# Altium PCB 404DoublesidePCB.PcbDoc
Units mil, origin at the board's own origin, x right, y up, seen from the top; angles counter-clockwise.
Board outline 6000 x 4000 mil, 2 copper layers (Top Layer, Bottom Layer); 27 components, 15 nets, 69 pads, 12 vias.
Unrouted connection lines stored in the file: 52.
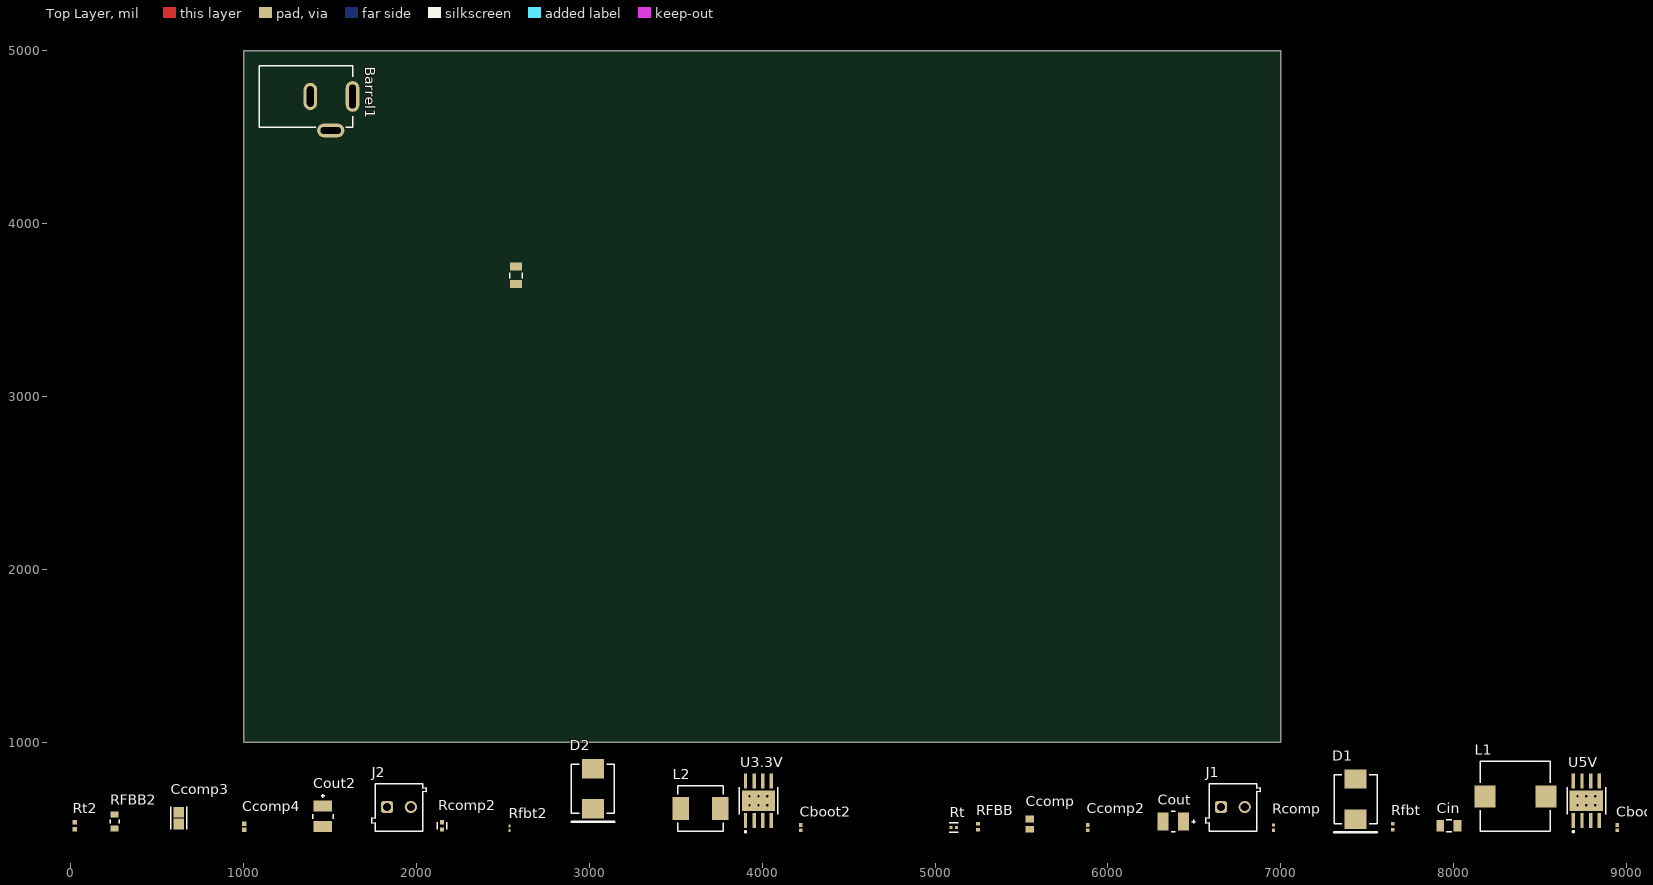
[diagram p0: Top Layer view]
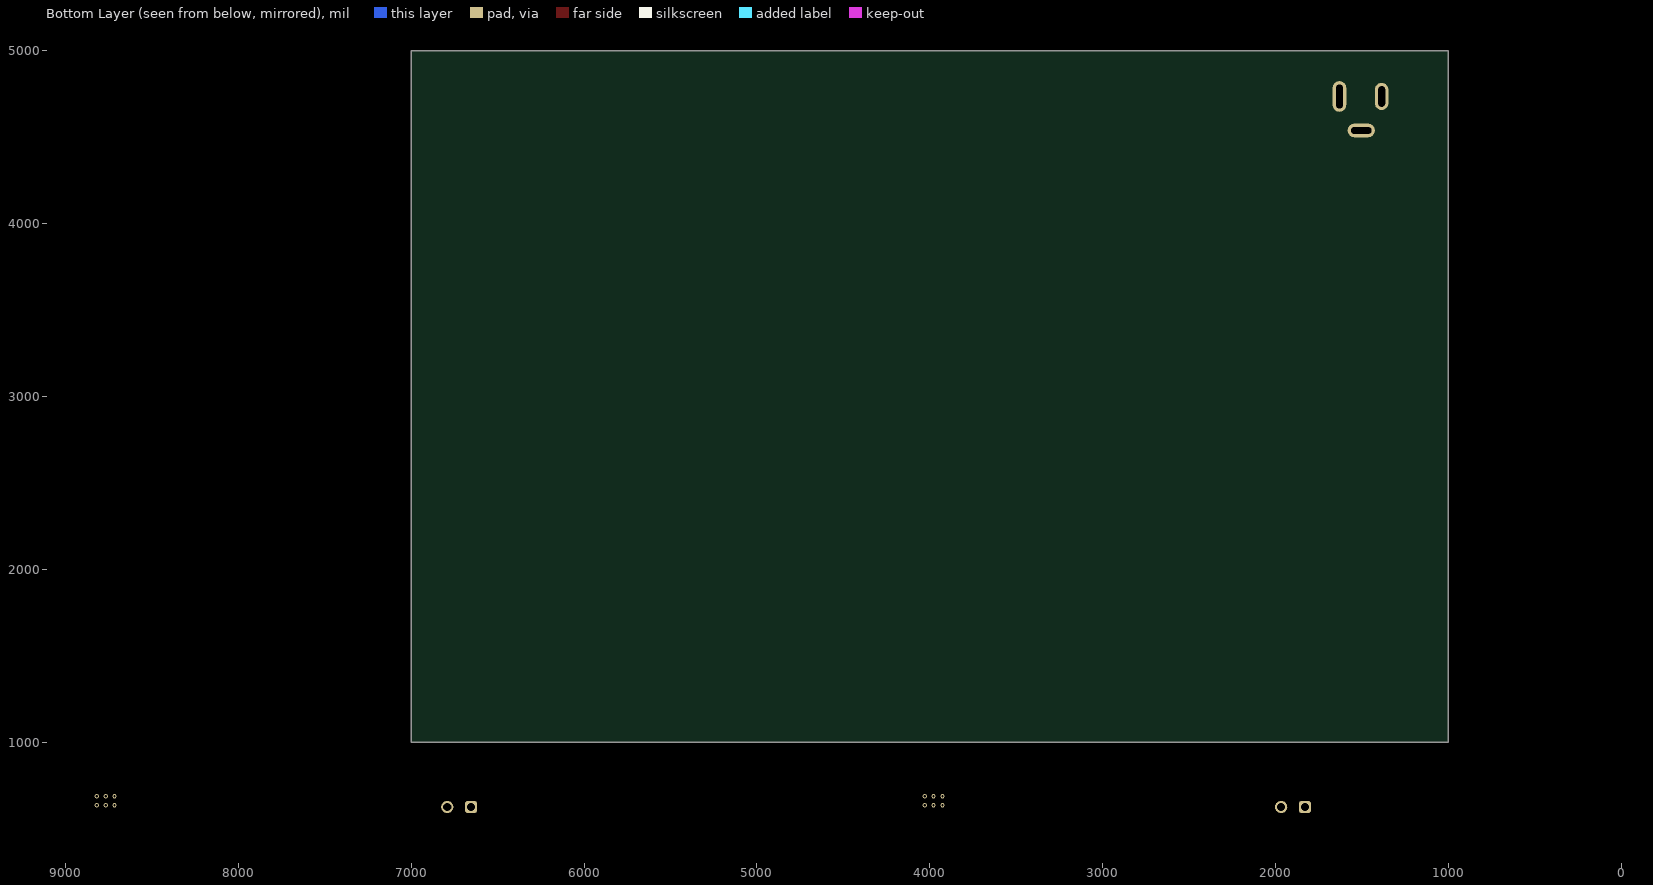
[diagram p1: Bottom Layer view, seen from below]

## Layer stack, top to bottom
Top Solder: solder mask 0.4, Solder Resist, Dk 3.5
Top Layer: signal copper 1.4
Dielectric 1: dielectric 12.6, FR-4, Dk 4.8
Bottom Layer: signal copper 1.4
Bottom Solder: solder mask 0.4, Solder Resist, Dk 3.5

## Board outline
1000,1000 7000,1000 7000,5000 1000,5000

## Design rules (kind name [scope] priority, off if disabled: settings)
Clearance [All] p1: gap=10 ignorepadtopadclearanceinfootprint=FALSE
PolygonConnect [All] p1: connectstyle=Relief reliefconductorwidth=10 reliefentries=4 polygonreliefangle="90 Angle" airgapwidth=10
RoutingVias [All] p1: holewidth=28 width=50 viastyle="Through Hole" minholewidth=28 minwidth=50 maxholewidth=28 maxwidth=50
SolderMaskExpansion [All] p1: expansion=4 istentingtop=FALSE
SupplyNets "Schematic Supply Nets" [InNet('GND')] p1: voltage=0.000
Width [All] p1: maxlimit=10 minlimit=10 preferedwidth=10
30 further rules are at their usual default settings.

## Components (designator, comment, footprint, x,y, rotation, side; value= is the part's Value field where it differs from the comment)
Barrel1 "KLDX-0202-B" KYCN-KLDX-0202-B_V 1089.72,4735 r0 top
Cboot "GRM155R71A104KA01D" CAPC1005X55X25LL05T10 8947.64,505 r90 top
Cboot2 "GRM155R71A104KA01D" CAPC1005X55X25LL05T10 4222.64,505 r90 top
Ccomp "GRM2195C1H152JA01D" CAPC2013X95X45LL10T25 5547.64,525 r90 top
Ccomp2 "GRM1555C1H150JA01D" CAPC1005X55X25LL05T10 5882.64,505 r90 top
Ccomp3 "C2012C0G1H223K125AA" FP-C2012-125-0_2-IPC_A 622.64,560 r90 top
Ccomp4 "GRM1555C1H160JA01D" CAPC1005X55X25NL05T10 1002.64,510 r90 top
Cin "GRM31CR71H475KA12L" FP-GRM31C-0_2-e0_3_0_8-IPC_C 7972.64,515 r0 top
Cin2 "GRM31CR71H475KA12L" FP-GRM31C-0_2-e0_3_0_8-IPC_C 2575,3700 r90 top
Cout "10TPE47MAZB" FP-POSCAP-B2-MFG 6377.64,540 r0 top
Cout2 "10TPE47MAZB" FP-POSCAP-B2-MFG 1457.64,570 r90 top
D1 "B560C-13-F" DIOD-B5X0C-2_M 7432.64,670 r90 top
D2 "B560C-13-F" DIOD-B5X0C-2_M 3020,730 r90 top
J1 "691103110002" 691103110002 56722.64,50620 r0 top
J2 "691103110002" 691103110002 51897.64,50620 r0 top
L1 "IHLP4040DZER220M11" FP-IHLP-4040DZ-FP_3_124x3-MFG 8357.64,685 r0 top
L2 "IHLP2525CZER100M11" FP-IHLP-2525CZ-FP_2_413x3-MFG 3642.64,615 r0 top
Rcomp "CRCW040221K5FKED" RESC1005X40X25LL05T05 6957.64,505 r90 top
Rcomp2 "CRCW04027K87FKED" FP-CRCW0402-e3-MFG 2147.64,515 r90 top
RFBB "CRCW040211K5FKED" RESC1005X40X25NL05T05 5247.64,510 r90 top
RFBB2 "RT0805BRD0711K7L" FP-RT0805-MFG 252.64,540 r90 top value=11.7kΩ
Rfbt "CRCW040260K4FKED" RESC1005X40X25NL05T05 7647.64,510 r90 top
Rfbt2 "CRCW020136K5FKED" RESC0603X28X15NL05T05 2537.64,500 r90 top
Rt "CRCW0402124KFKED" FP-CRCW0402-e3-IPC_C 5107.64,505 r0 top
Rt2 "CRCW0402182KFKED" RESC1005X40X25ML05T05 22.64,515 r90 top
U3.3V "TPS54560BQDDARQ1" FP-DDA0008E-MFG 3977.64,660 r90 top
U5V "TPS54560BQDDARQ1" FP-DDA0008E-MFG 8767.64,660 r90 top

## Footprints (in the part's own frame and the unit in brackets; to place one, negate y for a bottom-side part, rotate by r counter-clockwise, add the part's x,y. Pads: shape width x height; smd on the part's side, far side on the other; paste and mask are expansions set on the pad)
691103110002 [mm] "3,50mm - modular - blue - Horizontal wire entry - Pressure clamp - 8,4mm height - 02p"
  rrect50% 1.8x1.8 hole 1.2: 1(-1271.75,-1269.9)
  round 1.8 hole 1.2: 2(-1268.25,-1269.9)
  silkscreen extent -1274,-1273.5 -1266,-1266.5, body extent -1274,-1273.5 -1266,-1266.5, height 8.45
CAPC1005X55X25LL05T10 [mm] "Chip Capacitor, 2-Leads, Body 1.05x0.55mm, IPC High Density"
  rect 0.56x0.52 smd: 1(-0.39,0) 2(0.39,0)
  body extent -0.53,-0.28 0.53,0.28, height 0.55
CAPC1005X55X25NL05T10 [mm] "Chip Capacitor, 2-Leads, Body 1.00x0.50mm, IPC Medium Density"
  rect 0.66x0.62 smd: 1(-0.44,0) 2(0.44,0)
  body extent -0.53,-0.28 0.53,0.27, height 0.55
CAPC2013X95X45LL10T25 [mm] "Chip Capacitor, 2-Leads, Body 2.00x1.25mm, IPC High Density"
  rect 1x1.3 smd: 1(-0.75,0) 2(0.75,0)
  body extent -1.05,-0.67 1.05,0.68, height 0.95
DIOD-B5X0C-2_M [mm] "Molded Diode, 2-Leads, Body 7.11x6.22mm, IPC Low Density"
  rect 2.85x3.2 smd: 1(-2.95,0) 2(2.95,0)
  silkscreen extent -4.87,-3.15 3.6,3.15, body extent -3.56,-3.11 3.55,3.11, height 2.63
FP-C2012-125-0_2-IPC_A [mil]
  rect 62.13x61.27 smd paste+0 mask+0: 1(-34.02,0) 2(34.02,0)
  silkscreen extent -65,-46 65,46, body extent -85,-50 85,50, height 10
FP-CRCW0402-e3-IPC_C [mil]
  rect 18.43x18.6 smd paste+0 mask+0: 1(-15.83,0) 2(15.83,0)
  silkscreen extent -25,-27 25,27, body extent -29,-15 29,15, height 10
FP-CRCW0402-e3-MFG [mm]
  rect 0.6x0.6 smd paste+0 mask+0: 1(-0.525,0) 2(0.525,0)
  silkscreen extent -0.53,-0.7 0.53,0.7, body extent -0.92,-0.4 0.92,0.4, height 0.25
FP-DDA0008E-MFG [mm]
  rect 2.2x0.5 smd paste-1000 mask+0: 1(-2.875,1.905) 2(-2.875,0.635) 3(-2.875,-0.635) 4(-2.875,-1.905) 5(2.875,-1.905) 6(2.875,-0.635) 7(2.875,0.635) 8(2.875,1.905)
  rect 2.95x4.9 smd paste-1000 mask-1000: 9(0,0)
  silkscreen extent -4.67,-2.83 2,2.83, body extent -4.08,-2.68 4.08,2.68, height 0.25
FP-GRM31C-0_2-e0_3_0_8-IPC_C [mil]
  rect 45.46x67.17 smd paste+0 mask+0: 1(-50.23,0) 2(50.23,0)
  silkscreen extent -16,-35 16,35, body extent -77,-39 77,39, height 10
FP-IHLP-2525CZ-FP_2_413x3-MFG [mil]
  rect 95x135 smd paste+0 mask+0: 1(-115,0) 2(115,0)
  silkscreen extent -132,-132 132,132, body extent -166,-136 166,136, height 10
FP-IHLP-4040DZ-FP_3_124x3-MFG [mil]
  rect 122.99x127.99 smd paste+0 mask+0: 1(-176,0) 2(176,0)
  silkscreen extent -202,-202 202,202, body extent -241,-206 241,206, height 10
FP-POSCAP-B2-MFG [mm]
  rect 1.6x2.7 smd paste+0 mask+0: 1(-1.5,0) 2(1.5,0)
  silkscreen extent -0.33,-1.5 3.25,1.5, body extent -2.4,-1.6 2.4,1.6, height 0.25
FP-RT0805-MFG [mm]
  rect 0.9x1.2 smd paste+0 mask+0: 1(-1.05,0) 2(1.05,0)
  silkscreen extent -0.23,-0.67 0.23,0.67, body extent -1.6,-0.77 1.6,0.77, height 0.25
KYCN-KLDX-0202-B_V [mm] "3 Conductor Jack, 9 x 14.5 mm Body"
  oval 2x4.5 hole 1 slot 3.5 at 90 deg: 1(13.7,0)
  oval 2x4 hole 1 slot 3 at 90 deg: 2(7.5,0)
  oval 4x2 hole 1 slot 3 at 0 deg: 3(10.5,-5)
  silkscreen extent 0,-4.5 13.7,4.5, body extent -0.15,-5 14.35,4.5, height 11
RESC0603X28X15NL05T05 [mm] "Chip Resistor, 2-Leads, Body 0.60x0.30mm, IPC Medium Density"
  rect 0.45x0.35 smd: 1(-0.325,0) 2(0.325,0)
  body extent -0.33,-0.17 0.33,0.18, height 0.28
RESC1005X40X25LL05T05 [mm] "Chip Resistor, 2-Leads, Body 1.00x0.50mm, IPC High Density"
  rect 0.45x0.45 smd: 1(-0.4,0) 2(0.4,0)
  body extent -0.53,-0.27 0.53,0.28, height 0.4
RESC1005X40X25ML05T05 [mm] "Chip Resistor, 2-Leads, Body 1.00x0.50mm, IPC Low Density"
  rect 0.65x0.65 smd: 1(-0.5,0) 2(0.5,0)
  body extent -0.53,-0.27 0.53,0.28, height 0.4
RESC1005X40X25NL05T05 [mm] "Chip Resistor, 2-Leads, Body 1.00x0.50mm, IPC Medium Density"
  rect 0.55x0.55 smd: 1(-0.45,0) 2(0.45,0)
  body extent -0.53,-0.27 0.53,0.28, height 0.4

## Part data
Barrel1: library part CMP-0256-00001-1, "3 Conductor Power Jack, 2 break 2 aux contacts", ComponentLink1Description="Manufacturer URL", ComponentLink1URL=http://kycon.com/, ComponentLink2Description=Datasheet, ComponentLink2URL=http://anacapa.kycon.com/Catalog_PDF/KLDX_0202.pdf, Contact Finish=Brass, Mounting Technology="Through Hole", PackageDescription="Jack, 9 x 14.5 mm Body, 2.5 mm Center Pin Diameter", PackageReference=KLDX-0202-B, PartNumber=KLDX-0202-B
Cboot Cboot2: library part CMP-2000-06331-1, "Chip Capacitor, 0.1 uF, +/- 10%, 10 V, -55 to 125 degC, 0402 (1005 Metric), RoHS, Tape and Reel", Capacitance=100000pF, Case Size/Dimension=0402, Dielectric=X7R, Manufacturer=Murata, Package Description="2-Pin Surface Mount Device, Body 1 x 0.5 mm", Rated Voltage=10V, Tolerance (%)=±10%, Datasheet URL=http://search.murata.co.jp/Ceramy/image/img/A01X/G101/ENG/GRM155R71A104KA01-01.pdf, Datasheet Version=02/2016, Manufacturer URL=http://www.murata.com/, Mounting Technology=SurfaceMount, Package Reference=0402
Ccomp: library part CMP-2007-00140-1, Manufacturer=Murata, Part Number=GRM2195C1H152JA01D
Ccomp2: library part CMP-2008-04266-1, Manufacturer=Murata, Part Number=GRM1555C1H150JA01D
Ccomp3: library part CMP-08246-005332-1, "Multilayer Ceramic Capacitors 22nF ±10% 50V C0G SMD 0805", Capacitance=22nF, Case Code (Imperial)=0805, Case Code (Metric)=2012, Dielectric=C0G, Dielectric Material=Ceramic, Max Operating Temperature=125°C, Min Operating Temperature=-55°C, Package Quantity=2000, Tolerance=10%, Voltage Rating=50V, Case/Package=0805, Height=1.25mm, Lead Free="Lead Free", Length=0.079inch, Mount="Surface Mount", Packaging="Tape and Reel", RoHS Compliant=Yes, Series=C, Termination=SMD/SMT, Thickness=0.057inch, Voltage Rating (DC)=50V, Weight=0.000194oz, Width=1.25mm
Ccomp4: library part CMP-2008-03924-1, Manufacturer=Murata, Part Number=GRM1555C1H160JA01D
Cin Cin2: library part CMP-1037-04923-3, "Chip Multilayer Ceramic Capacitors for General Purpose, 1206, 4.7uF, X7R, 15%, 10%, 50V", Capacitance=4.7uF, Case Code (Imperial)=1206, Case Code (Metric)=3216, Dielectric=X7R, Max Operating Temperature=125°C, Min Operating Temperature=-55°C, Package Quantity=2000, Tolerance=10%, Voltage=50V, Case/Package=1206, Depth=1.6mm, Height=1.6mm, Lead Free="Lead Free", Length=3.2mm, Material=Ceramic, Mount="Surface Mount", Packaging="Tape and Reel", Radiation Hardening=No, REACH SVHC="No SVHC", Termination=SMD/SMT, Thickness=0.071inch, Voltage Rating=50V, Voltage Rating (DC)=50V, Width=0.063inch
Cout Cout2: library part CMP-05428-001174-1, "Molded Tantalum Polymer Capacitor 47uF 20% 10V life 1000Hours SMD 1411", Capacitance=47uF, Case Code (Imperial)=1210, Case Code (Metric)=3528, Case/Package=Molded, ESR (Equivalent Series Resistance)=35mR, Leakage Current=47uA, Max Operating Temperature=105°C, Min Operating Temperature=-55°C, Package Quantity=2000, Ripple Current=1.4A, Tolerance=20%, Voltage=10V, Construction=Flat, Depth=2.8mm, Dissipation Factor=8%, Features="General Purpose", Height=1.9mm, Height - Seated (Max)=0.079inch, Lead Free="Lead Free", Length=3.5mm, Mount="Surface Mount", Number of Pins=2, Packaging="Tape and Reel", Polarity=Polar, Radiation Hardening=No, REACH SVHC="No SVHC", RoHS Compliant=Yes, Series="POSCAP™ TPE", Termination=SMD/SMT, Voltage Rating=10V, Voltage Rating (DC)=10V, Width=2.8mm
D1 D2: library part CMP-2000-05098-2, "Schottky Barrier Rectifier, 5 A, 60 V, -55 to 125 degC, 2-Pin SMD, RoHS, Tape and Reel", If - Forward Current=5A, Ifsm - Forward Surge Current=100A, Ir - Reverse Current=500uA, Manufacturer=DiodesIncorporated, Maximum Operating Temperature=+125C, Minimum Operating Temperature=-55C, Operating Temperature Range=-55Cto+125C, Package / Case=SMC, Vf - Forward Voltage=0.7V, Vrrm - Repetitive Reverse Voltage=60V, Brand=DiodesIncorporated, Configuration=Single, Datasheet URL=https://datasheet.ciiva.com/27052/1538961-27052355.pdf, Datasheet Version="Rev. 7-2, 06/2007", Factory Pack Quantity=3000, Height=2.5mm, Length=7.11mm, Manufacturer URL=http://www.diodes.com/, Mounting Style=SMD/SMT, Packaging=Reel, Product=SchottkyDiodes, Product Category=SchottkyDiodes&Rectifiers, RoHS=True, Series=B560, Technology=Si, Termination Style=SMD/SMT, Type=SchottkyBarrierRectifier, Unit Weight=0.007408oz, Width=6.22mm
J1 J2: library part CMP-1502-03254-2, Color=Blue, Current=10A, Max Operating Temperature=105°C, Min Operating Temperature=-40°C, Voltage=125V, Contact Material="Brass, Copper, Nickel, Tin, Zinc", Contact Plating=Tin, Current Rating=10A, Height=8.5mm, Housing Material=Nylon, Lead Pitch=3.5mm, Length=7mm, Mount="Through Hole", NexarPartId=18818286, Number of Contacts=2, Number of Levels=1, Number of Pins=2, Number of Positions Per Level=2, Number of Rows=1, Packaging=Box, Pitch=3.5052mm, Plating=Steel, REACH SVHC=Unknown, RoHS=Compliant, Stripping Length=-6mm, Termination=Screw, Voltage Rating=125V, Width=8mm, Wire Gauge (Max)=26AWG, Wire Gauge (Min)=16AWG, Wire/Cable Gauge=26AWG
L1: library part CMP-02424-000785-1, "Commercial Inductors, Low DCR Series 22uH 5A 66mΩ 20%", Case/Package=4040, Current Rating=5A, DC Resistance (DCR)=66mR, Inductance=22uH, Inductance Tolerance=20%, Max DC Current=4.5A, Max Operating Temperature=125°C, Min Operating Temperature=-55°C, Package Quantity=1, Self Resonant Frequency=1MHz, Test Frequency=100kHz, Contact Plating=Tin, Core Material=Metal, Depth=10.3mm, Height=4mm, Height - Seated (Max)=0.157inch, Lead Free="Lead Free", Length=0.43inch, Military Standard=Not, Mount="Surface Mount", Packaging="Tape and Reel", Radiation Hardening=No, Rated Current-Max=5A, RMS Current (Irms)=5A, RoHS Compliant=Yes, Saturation Current=4.5A, Series=IHLP-4040DZ-11, Shielding=Shielded, Termination=SMD/SMT, Tolerance=20%, Width=0.405inch
L2: library part CMP-02424-000281-1, "Commercial Inductors, Low DCR Series 10uH 4A 71.2mΩ 20%", Case Code (Imperial)=2525, Case Code (Metric)=6363, Current Rating=4A, DC Resistance (DCR)=71.2mR, Inductance=10uH, Inductance Tolerance=20%, Max DC Current=3A, Max Operating Temperature=125°C, Min Operating Temperature=-55°C, Package Quantity=2000, Saturation Current=3.5A, Self Resonant Frequency=5MHz, Test Frequency=100kHz, Case/Package=2525, Contact Plating=Tin, Core Material=Ferrite, Depth=6.72mm, Height=3mm, Height - Seated (Max)=0.118inch, Lead Free="Lead Free", Length=7.24mm, Military Standard=Not, Mount="Surface Mount", Number of Pins=2, Packaging="Tape and Reel", Radiation Hardening=No, RMS Current (Irms)=4A, Shielding=Shielded, Termination=SMD/SMT, Tolerance=20%, Width=0.255inch
Rcomp: library part CMP-2002-08367-1, Manufacturer="Vishay Dale", Part Number=CRCW040221K5FKED
Rcomp2: library part CMP-2002-00224-2, "RES Thick Film, 7.87kΩ, 1%, 0.063W, 100ppm/°C, 0402", Case Code (Imperial)=0402, Case Code (Metric)=1005, Max Operating Temperature=155°C, Max Power Dissipation=63mW, Min Operating Temperature=-55°C, Package Quantity=10, Resistance=7.87kR, Resistance Tolerance=1%, Resistor Type="Thick Film", Temperature Coefficient=100ppm/°C, Voltage Rating=50V, Case/Package=0402, Construction=Rectangular, Contact Plating=Tin, Depth=0.5mm, Features="Automotive AEC-Q200", Height=0.35mm, Lead Free="Lead Free", Length=1mm, Military Standard=Not, Mount="Surface Mount", Number of Pins=2, Number of Terminations=2, Packaging="Tape and Reel", Power Rating=63mW, Radiation Hardening=No, RoHS Compliant=Yes, Series=CRCW, Size Code=0402, Technology="THICK FILM", Termination=SMD/SMT, Tolerance=1%, Voltage Rating (DC)=50V, Weight=2.3E-05oz, Width=0.5mm
RFBB: library part CMP-2002-08161-1, Manufacturer="Vishay Dale", Part Number=CRCW040211K5FKED
RFBB2: library part CMP-03412-011069-1, "RES 11.7K OHM 0.1% 1/8W 0805", Manufacturer=Yageo, Package=RT0805, Power Rating=0.125W, Resistance=11.7kΩ, Temperature="-55°C to +155°C", Temperature Coefficient=25ppm/°C, Temperature Range High=+155°C, Temperature Range Low=-55°C, Tolerance=0.1%, Voltage Rating=150V, Automotive=No, Category=Res, ComponentLink2Description=Datasheet, ComponentLink2URL=http://www.yageo.com/documents/recent/PYu-RT_1-to-0.01_RoHS_L_9.pdf, Composition="Thin Film", Device Class L1="Passive Components", Device Class L2=Resistors, Device Class L3="Chip SMD Resistors", Digikey Description="RES 11.7K OHM 0.1% 1/8W 0805", Footprint Url=http://www.yageo.com/exep/pages/download/literatures/PYu-R_Mount_10.pdf, Height=0.6mm, Ipc Land Pattern Name=RESC200125X50, Lead Free=Yes, Manufacturer Part Number=RT0805BRD0711K7L, Mouser Description="High Precision-High Stability Chip Resistor Thin Film 0805 11.7kOhm 0.1% Paper T/R", Octopart=https://octopart.com/rt0805brd0711k7l-yageo-78404094, RoHS=TRUE, Series=RT
Rfbt: library part CMP-2002-00139-1, Manufacturer="Vishay Dale", Part Number=CRCW040260K4FKED
Rfbt2: library part CMP-1010-00592-2, Manufacturer="Vishay Dale", Part Number=CRCW020136K5FKED
Rt: library part CMP-2002-08173-2, "RES Thick Film, 124kΩ, 1%, 0.063W, 100ppm/°C, 0402", Case Code (Imperial)=0402, Case Code (Metric)=1005, Max Operating Temperature=155°C, Max Power Dissipation=63mW, Min Operating Temperature=-55°C, Package Quantity=10, Resistance=124kR, Temperature Coefficient=100ppm/°C, Tolerance=1%, Voltage Rating=50V, Case/Package=0402, Composition="Thick Film", Contact Plating=Tin, Depth=0.5mm, Features="Automotive AEC-Q200", Height=0.016inch, Length=1mm, Military Standard=Not, Number of Pins=2, Number of Terminations=2, Packaging="Tape and Reel", Power Rating=63mW, Radiation Hardening=No, Termination=SMD/SMT, Weight=2.3E-05oz, Width=0.02inch
Rt2: library part CMP-2002-08256-1, Manufacturer="Vishay Dale", Part Number=CRCW0402182KFKED
U3.3V U5V: library part CMP-04918-000347-1, "IC REG BCK SPLIT RAIL ADJ 8SOPWR", Max Input Voltage=60V, Max Operating Temperature=125°C, Max Output Voltage=58.8V, Min Input Voltage=4.5V, Min Operating Temperature=-40°C, Min Output Voltage=800mV, Output Current=5A, Switching Frequency=2.5MHz, Mount="Surface Mount", Number of Outputs=1, Number of Pins=8, Output Configuration=Positive, Output Type=Adjustable, Packaging="Tape and Reel", RoHS Compliant=Yes, Synchronous Rectifier=No

## Via types
v1: diameter 24.8, hole 12.99, Top Layer to Bottom Layer, 12 vias

## Nets (pads, with @x,y where several pads share a name; then routed paths per layer and width w, separated by ;. In a path a pad name is that pad's centre, name@x,y a point inside that pad or via, vN(x,y) a via of type N, cw(c..) or ccw(c..) an arc to the next point about the centre after c; other vN are vias at no path point)
GND: Barrel1.2 Barrel1.3 Ccomp2.1 Ccomp3.2 Ccomp4.1 Ccomp.1 Cin2.2 Cin.2 Cout2.1 Cout.1 D1.2 D2.2 J1.2 J2.2 RFBB2.1 RFBB.1 Rt2.1 Rt2.2 Rt.1 U3.3V.4 U3.3V.7 U3.3V.9 U5V.7 U5V.9
  other v1: 3926.46,634.41 3977.64,634.41 4028.82,634.41 8716.46,634.41 8767.64,634.41 8818.82,634.41 3926.46,685.59 3977.64,685.59 4028.82,685.59 8716.46,685.59 8767.64,685.59 8818.82,685.59
NetBarrel1_1: Barrel1.1 Cin2.1 Cin.1 U3.3V.2 U5V.2
NetCboot2_1: Cboot2.1 U3.3V.1
NetCboot2_2: Cboot2.2 D2.1 L2.1 U3.3V.8
NetCboot_1: Cboot.1 D1.1 L1.1 U5V.8
NetCboot_2: Cboot.2 U5V.1
NetCcomp2_2: Ccomp2.2 Rcomp.2 U5V.6
NetCcomp3_1: Ccomp3.1 Rcomp2.1
NetCcomp4_2: Ccomp4.2 Rcomp2.2 U3.3V.6
NetCcomp_2: Ccomp.2 Rcomp.1
NetCout2_2: Cout2.2 J2.1 L2.2 Rfbt2.2
NetCout_2: Cout.2 J1.1 L1.2 Rfbt.2
NetRFBB2_2: RFBB2.2 Rfbt2.1 U3.3V.5
NetRFBB_2: RFBB.2 Rfbt.1 U5V.5
NetRt_2: Rt.2 U5V.4
pads on no net: U3.3V.3 U5V.3